# EAGLE board untitled (EAGLE 8.4.1)
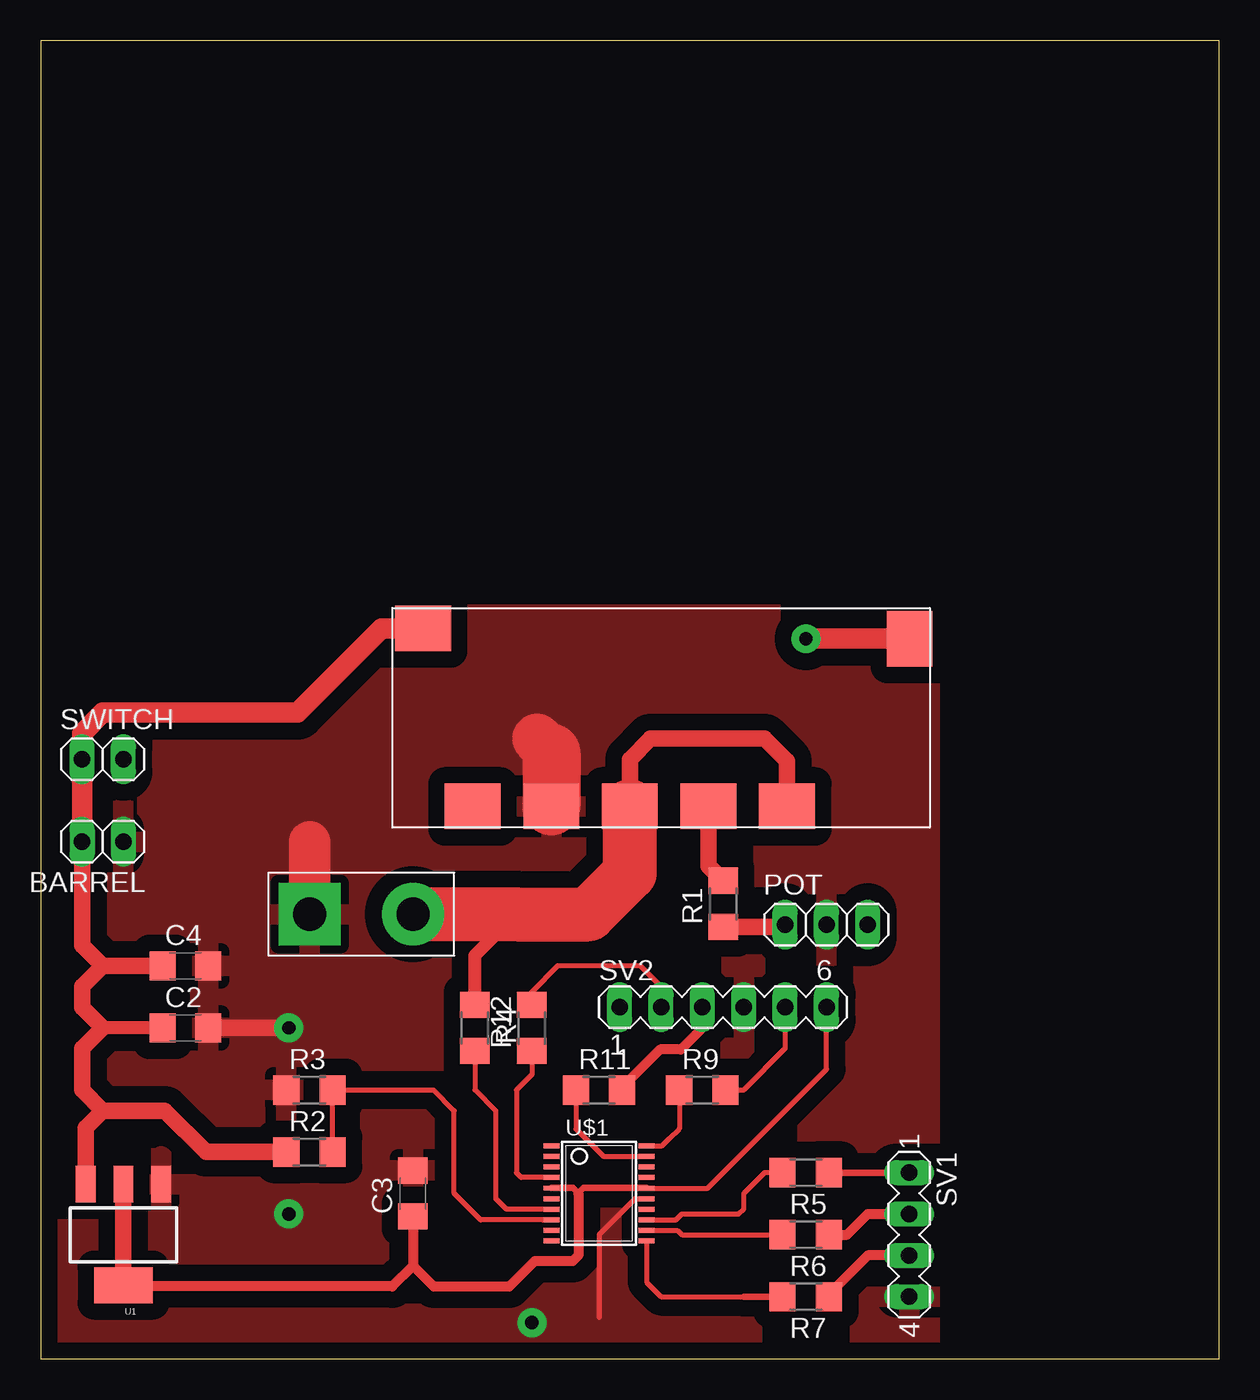
[diagram p0: board, top side]
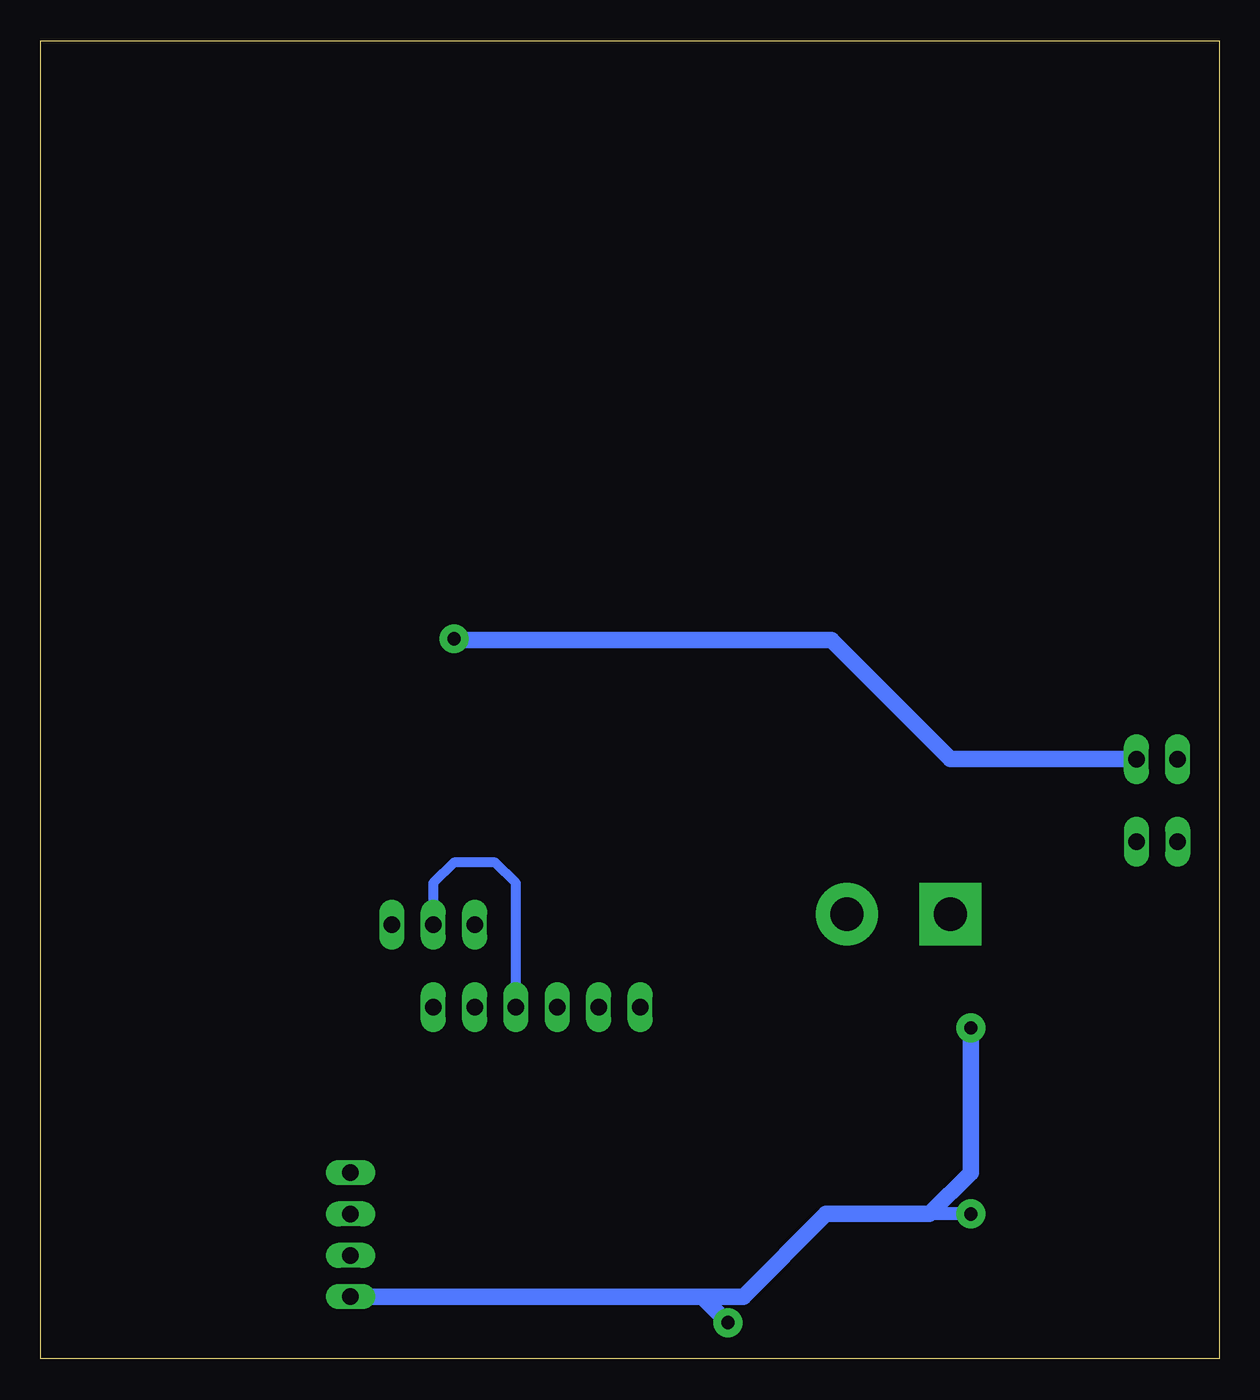
[diagram p1: board, bottom side, seen from below]

Size 72.37 x 80.95 mm. Coordinates in mm from the lower left corner, seen from the top.
Outline: 0,0 72.37,0 72.37,80.95 0,80.95 0,0
Copper layers (1*16): Top 0.0356mm / dielectric 1.5011mm / Bottom 0.0356mm
Design rules "IEEE-Medium": minimum track width 10mil, minimum drill 32mil, track to track 32mil, track to pad 10mil, pad to pad 10mil, via to via 10mil, smd to smd 10mil, copper to edge 15mil, drill to drill 10mil, minimum pad ring 7mil, minimum via ring 7mil, stop-mask expansion 2.5mil, vias tented up to drill 0mil, thermal gap 20mil
Net classes: 0 default: width 0.254 mm, drill 0.254 mm, clearance 0.762 mm

## Footprints (pad centres in the part's own frame; a part is rotated, then mirrored left to right if it is on the bottom)
1X02 = drill 1.016 long: 1 -1.27,0; 2 1.27,0
C1206 = smd 1.6 x 1.8: 1 -1.4,0; 2 1.4,0
OKY-T/16-D12N-C = smd 2.79 x 3.43: PIN1 15.28,4.85 | smd 3.43 x 2.79: PIN2 -14.62,5.49; PIN3 -11.57,-5.44; PIN4 -6.74,-5.44; PIN5 -1.92,-5.44; PIN6 2.91,-5.44; PIN7 7.74,-5.44
1X03 = drill 1.016 long: 1 -2.54,0; 2 0,0; 3 2.54,0
POWER = drill 2.032 pad 3.81 square: GND 2.54,0 | drill 2.032 pad 3.81: VOUT -3.81,0
R1206 = smd 1.6 x 1.803: 1 -1.422,0; 2 1.422,0
MA04-1 = drill 1.016 long: 1 -3.81,0; 2 -1.27,0; 3 1.27,0; 4 3.81,0
MA06-1 = drill 1.016 long: 1 -6.35,0; 2 -3.81,0; 3 -1.27,0; 4 1.27,0; 5 3.81,0; 6 6.35,0
SOT223 = smd 1.219 x 2.235: 1 -2.311,-3.099; 2 0,-3.099; 3 2.311,-3.099 | smd 3.6 x 2.2: 4 0,3.099
TSSOP20 = smd 0.305 x 0.991: 1 -2.925,-2.918; 2 -2.275,-2.918; 3 -1.625,-2.918; 4 -0.975,-2.918; 5 -0.325,-2.918; 6 0.325,-2.918; 7 0.975,-2.918; 8 1.625,-2.918; 9 2.275,-2.918; 10 2.925,-2.918; 11 2.925,2.918; 12 2.275,2.918; 13 1.625,2.918; 14 0.975,2.918; 15 0.325,2.918; 16 -0.325,2.918; 17 -0.975,2.918; 18 -1.625,2.918; 19 -2.275,2.918; 20 -2.925,2.918

## Placement (x,y rotation side)
BARREL  [1X02]  3.81,31.75 180 top
C2  [C1206]  8.89,20.32 0 top
C3  [C1206]  22.86,10.16 90 top
C4  [C1206]  8.89,24.13 0 top
OKY-T/16-D12N-C  OKY-T/16-D12N-C  [OKY-T/16-D12N-C]  38.1,39.37 0 top
POT  100k  [1X03]  48.26,26.67 0 top
POWER  POWER  [POWER]  19.05,27.3 180 top
R1  [R1206]  41.91,27.94 90 top
R2  7.5k  [R1206]  16.51,12.7 0 top
R3  2.5k  [R1206]  16.51,16.51 0 top
R4  1k  [R1206]  26.67,20.32 270 top
R5  250  [R1206]  46.99,11.43 180 top
R6  250  [R1206]  46.99,7.62 180 top
R7  300  [R1206]  46.99,3.81 180 top
R9  250  [R1206]  40.64,16.51 0 top
R11  250  [R1206]  34.29,16.51 0 top
R12  250  [R1206]  30.16,20.32 90 top
SV1  [MA04-1]  53.34,7.62 270 top
SV2  [MA06-1]  41.91,21.59 0 top
SWITCH  [1X02]  3.81,36.83 0 top
U1  [SOT223]  5.08,7.62 180 top
U$1  STM32F07  [TSSOP20]  34.29,10.16 270 top

## Library data of the parts
BARREL POT SWITCH = pinhead
C2-C4 R1-R7 R9 R11 R12 = rcl
OKY-T/16-D12N-C POWER U$1 = chip
SV1 SV2 = con-lstb; OC_FARNELL: unknown; OC_NEWARK: unknown
U1 = SparkFun-IC-Power; PROD_ID: VREG-08170

## Nets
3V3: C3.1 SV2.6 U1.2 U1.4 U$1.5 U$1.16
GND: BARREL.1 C2.2 C3.2 C4.2 OKY-T/16-D12N-C.PIN4 POT.2 POWER.GND R3.1 SV1.4 SV2.4 U1.1 U$1.15
N$1: OKY-T/16-D12N-C.PIN1 SWITCH.2
N$2: R5.1 SV1.1
N$3: POT.1 R1.1
N$4: OKY-T/16-D12N-C.PIN6 R1.2
N$5: R2.2 R3.2 U$1.8
N$6: R7.2 U$1.11
N$7: R5.2 U$1.13
N$8: R6.2 U$1.12
N$9: R4.2 U$1.7
N$11: R6.1 SV1.2
N$12: R7.1 SV1.3
N$19: R9.2 SV2.5
N$21: R11.2 SV2.3
N$22: R12.2 SV2.2
NRST: R12.1 U$1.4
SWCLK: R9.1 U$1.20
SWDIO: R11.1 U$1.19
SWO: SV2.1
VIN: BARREL.2 C2.1 C4.1 OKY-T/16-D12N-C.PIN2 R2.1 SWITCH.1 U1.3
VOUT: OKY-T/16-D12N-C.PIN5 OKY-T/16-D12N-C.PIN7 POWER.VOUT R4.1

## Tracks (layer width: path | path; a pad name or v marks a point on that pad's centre or on a via)
3V3
  Top 0.305: U$1.16 40.96,10.48 48.26,17.78 SV2.6
  Top 0.406: U$1.5 32.7,10.48 33.02,10.16 33.34,10.48 U$1.16
  Top 0.61: 33.02,10.16 33.02,6.35 32.69,6.02 30.36,6.02 28.79,4.45 24.13,4.45 22.86,5.71 | U1.4 5.16,4.45 21.59,4.45 22.86,5.71 | C3.1 22.86,5.71
  Top 1.016: U1.4 U1.2
GND  (via drill 0.81 pad 1.78)
  Top 0.305: U$1.15 36.51,9.84 34.29,7.62 34.29,2.54
  Top 1.016: C2.2 v15.24,20.32
  Top 2.54: POWER.GND 16.51,31.75
  Top 3.048: 31.36,37.22 30.48,38.1 | OKY-T/16-D12N-C.PIN4 31.43,33.86
  Top 3.556: 31.36,37.22 OKY-T/16-D12N-C.PIN4
  Bottom 0.61: SV2.4 43.18,29.21 44.45,30.48 46.99,30.48 48.26,29.21 POT.2
  Bottom 0.813: v15.24,8.89 17.78,8.89
  Bottom 1.016: SV1.4 31.75,3.81 | 31.75,3.81 v30.16,2.22 | v15.24,20.32 15.24,11.43 17.78,8.89 24.13,8.89 29.21,3.81 31.75,3.81
  pour Top (isolate 1.016): -1.27,45.72 54.61,45.72 54.61,-1.27 -1.27,-1.27
N$1  (via drill 0.81 pad 1.78)
  Top 1.27: v46.99,44.22 OKY-T/16-D12N-C.PIN1
  Bottom 1.016: SWITCH.2 16.51,36.83 23.81,44.13 46.99,44.13 v46.99,44.22
N$2
  Top 0.406: R5.1 SV1.1
N$3
  Top 1.016: R1.1 45.57,26.52 POT.1
N$4
  Top 1.016: OKY-T/16-D12N-C.PIN6 41.01,30.26 R1.2
N$5
  Top 0.305: 30.84,8.54 U$1.8 27.02,8.54 25.4,10.16 25.4,15.24 24.13,16.51 R3.2 R2.2
N$6
  Top 0.305: U$1.11 37.21,4.7 38.1,3.81 43.18,3.81
  Top 0.406: 43.18,3.81 R7.2
N$7
  Top 0.305: R5.2 44.45,11.43 43.18,10.16 43.18,9.21 42.86,8.89 39.37,8.89 39.02,8.54 U$1.13
N$8
  Top 0.305: U$1.12 39.1,7.88 39.37,7.62 R6.2
  Top 0.406: 45.4,6.99 45.4,7.46 R6.2
N$9
  Top 0.305: U$1.7 28.6,9.19 27.94,9.84 27.94,15.24 26.67,16.51 R4.2
N$11
  Top 0.61: R6.1 49.53,7.62 50.8,8.89 SV1.2
N$12
  Top 0.61: SV1.3 50.8,6.35 48.9,4.45 | 48.9,4.45 48.41,3.96 | R7.1 48.9,4.29 48.9,4.45
N$19
  Top 0.305: R9.2 43.18,16.51 45.72,19.05 SV2.5
N$21
  Top 0.305: 35.71,16.66 R11.2
  Top 0.61: R11.2 35.71,16.66 38.05,19 39.32,19 40.64,20.32 SV2.3
N$22
  Top 0.305: R12.2 30.16,22.54 31.75,24.13 36.83,24.13 38.1,22.86 SV2.2
NRST
  Top 0.305: U$1.4 29.5,11.13 29.21,11.43 29.21,16.51 30.16,17.46 R12.1
SWCLK
  Top 0.305: R9.1 39.22,14.14 38.58,13.49 | 38.58,13.49 38.42,13.34 | U$1.20 38.17,13.09 38.58,13.49
SWDIO
  Top 0.305: R11.1 32.87,14.12 34.55,12.44 U$1.19
VIN
  Top 0.813: C2.1 3.81,20.32
  Top 1.016: 2.41,31.62 BARREL.2 2.54,25.4 3.81,24.13 | 3.81,24.13 2.54,22.86 2.54,21.59 3.81,20.32 2.54,19.05 2.54,16.51 3.81,15.24 | 3.81,24.13 C4.1 | 3.81,15.24 2.77,14.2 U1.3 | 3.81,15.24 7.62,15.24 10.16,12.7 R2.1
  Top 1.27: BARREL.2 SWITCH.1 2.54,38.42 3.81,39.69 15.77,39.69 20.94,44.86 OKY-T/16-D12N-C.PIN2
VOUT
  Top 0.813: 33.02,26.67 33.66,27.3 | R4.1 26.67,24.77 29.21,27.3
  Top 1.016: OKY-T/16-D12N-C.PIN7 45.84,36.71 44.45,38.1 37.47,38.1 36.18,36.81 OKY-T/16-D12N-C.PIN5
  Top 3.302: OKY-T/16-D12N-C.PIN5 36.18,29.83 33.66,27.3 29.21,27.3 POWER.VOUT